# Altium PCB pcb Rev1.1.2_2021-03-04.pcbdoc (part 2 of 2)
Units mil, origin at the board's own origin, x right, y up, seen from the top; angles counter-clockwise.
Board outline 3907.67 x 3907.67 mil, 2 copper layers (Top Layer, Bottom Layer); 144 components, 104 nets, 451 pads, 133 vias.
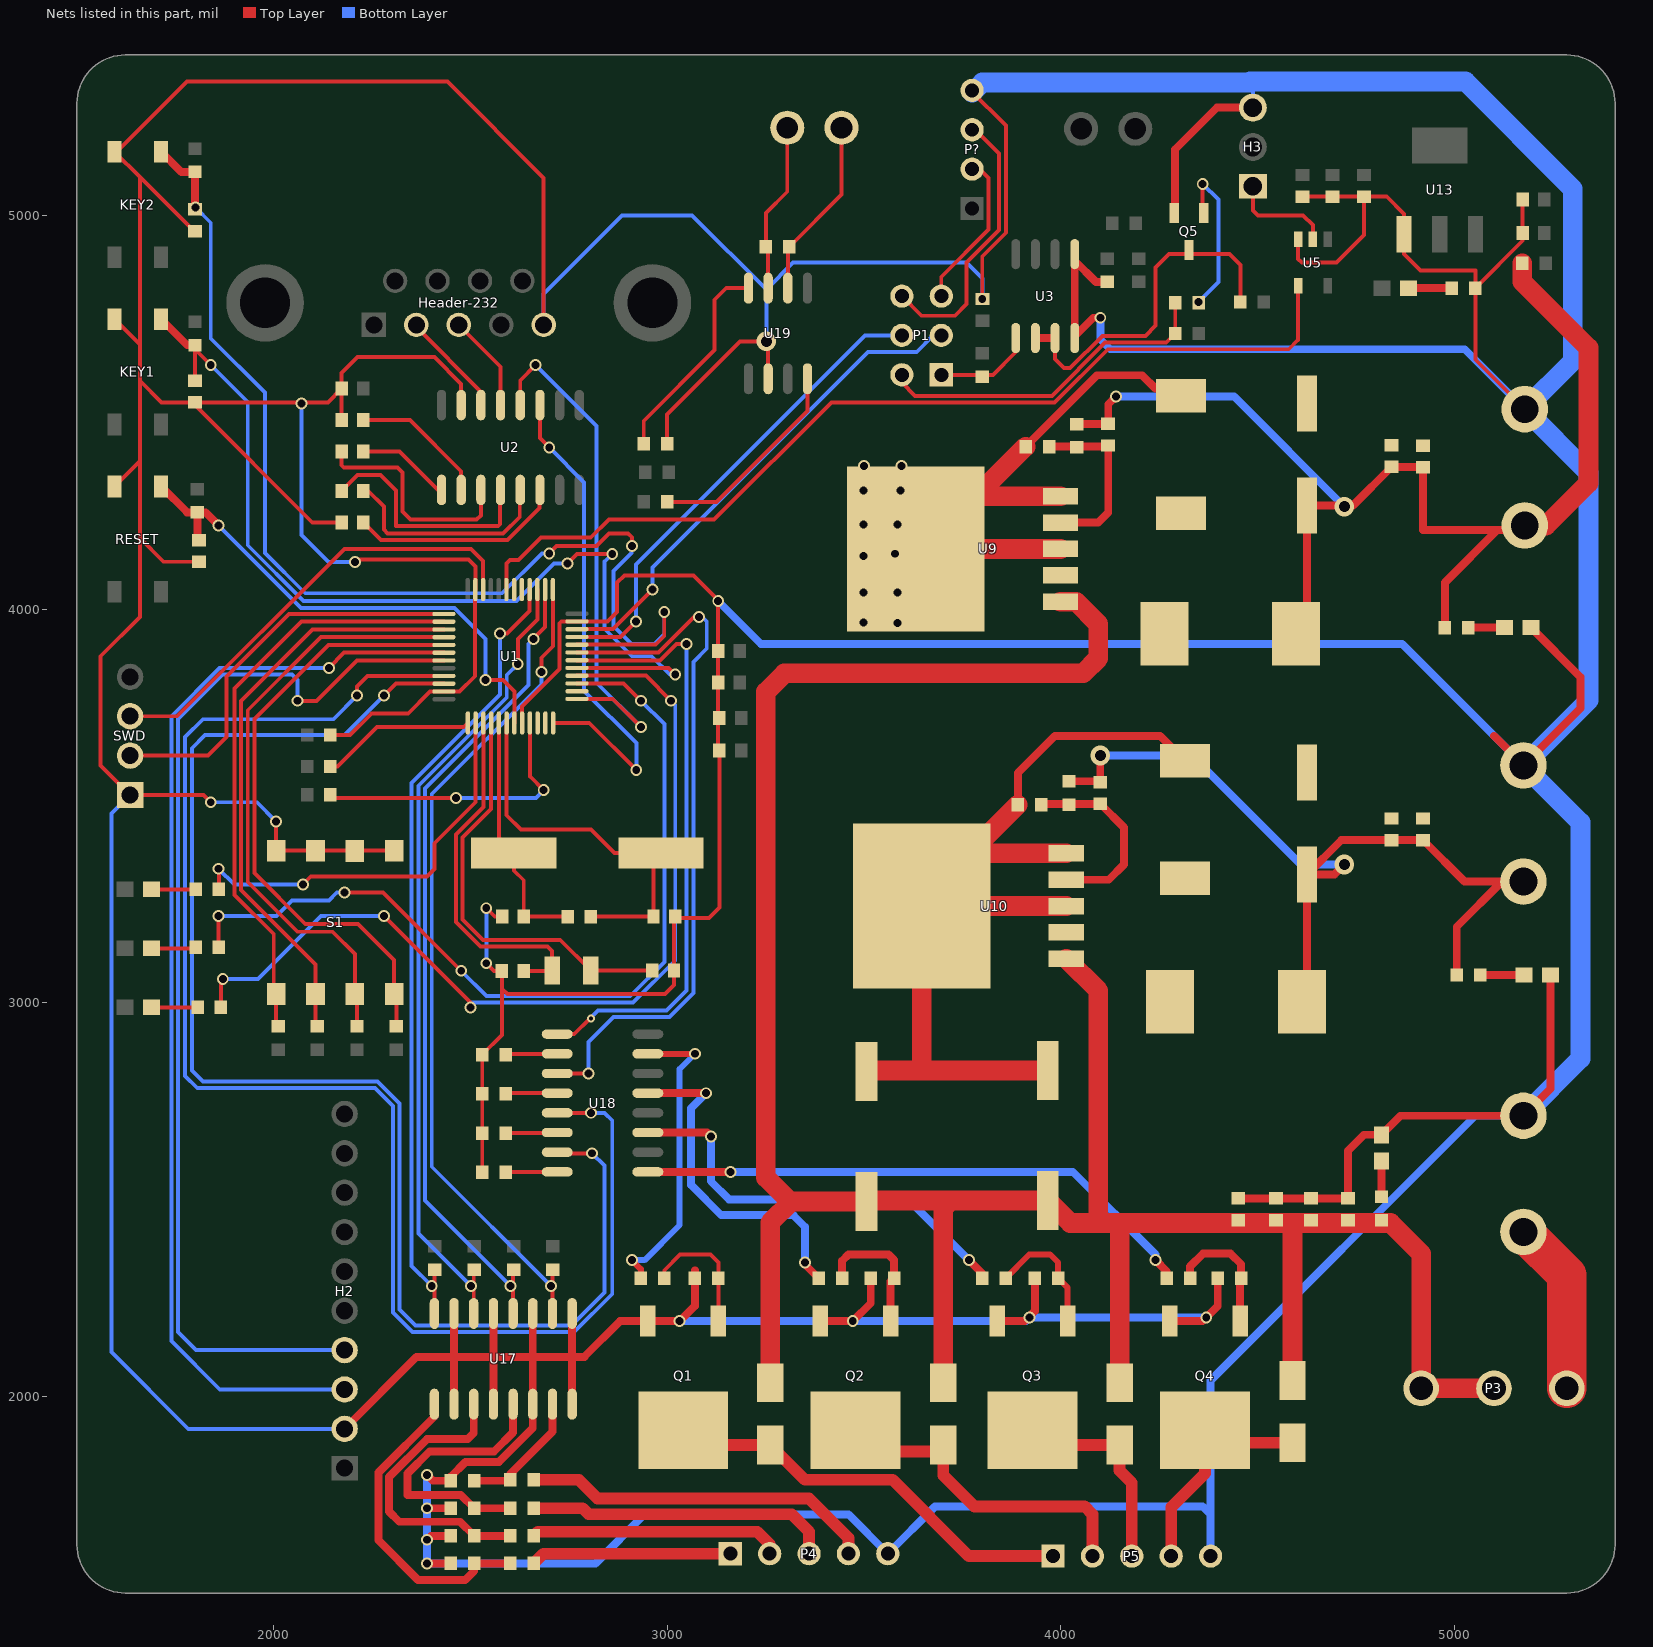
[diagram p2: the nets of this part, all layers, seen from the top]

## Via types
v1: diameter 30, hole 20, Top Layer to Bottom Layer, 123 vias
v2: diameter 50, hole 28, Top Layer to Bottom Layer, 5 vias
v3: diameter 118.11, hole 118.11, Top Layer to Bottom Layer, 4 vias
v4: diameter 20, hole 10, Top Layer to Bottom Layer, 1 vias

## Nets (pads, with @x,y where several pads share a name; then routed paths per layer and width w, separated by ;. In a path a pad name is that pad's centre, name@x,y a point inside that pad or via, vN(x,y) a via of type N, cw(c..) or ccw(c..) an arc to the next point about the centre after c; other vN are vias at no path point) (continued)
GND: C1.1 C2.1 C3.1 C4.1 C5.1 C8.1 C9.2 C10.2 C11.2 C12.1 C13.1 C14.1 C15.1 C16.1 C17.1 C18.1 C19.1 C20.1 C21.2 C22.1 C23.1 C24.1 C25.1 C26.2 C27.1 C29.1 C30.1 C31.1 C32.1 C40.1 C46.2 C47.2 D2.2 D3.2 H2.2 H3.3 Header-232.5 KEY1.2 KEY2.2 LED5.2 LED6.2 LED8.2 P4.5 P5.5 P?.4 Q1.3 Q2.3 Q3.3 Q4.3 Q5.2 R2.2 R7.2 R12.2 R14.2 R33.1 R34.1 R35.1 R36.1 R37.2 R39.1 R41.1 R43.1 R44.2 R46.1 R47.2 R48.2 R49.1 R57.1 RESET.2 S1.1 S1.2 S1.3 S1.4 SWD.1 U1.8 U1.23 U1.35 U1.47 U2.15 U3.4 U3.5 U5.3 U9.3 U9.5 U9.6 U10.3 U10.5 U10.6 U12.1 U13.1 U15.1 U16.1 U17.2 U17.4 U17.6 U17.8 U17.9 U17.11 U17.13 U17.15 U19.2 | length 40163.2
  Top Layer w10: RESET.2@1595.94,4311.5 1660,4375.56 ; KEY1.2@1595.94,4736.5 1660,4672.44 ; C15.1@1800,4960.08 1797.35,4960.08 1660,5097.44 ; C5.1@1810,4120.08 1719.92,4120.08 1660,4180 ; v1(1840,3509.03) 1821.39,3527.64 SWD.1@1635,3527.64 1560,3602.64 1560,3880 1660,3980 1660,4180 ; v1(2006.02,3460) S1.4@2006.02,3386.02 S1.3@2106.02,3386.02 S1.1@2306.02,3386.02 ; R2.2@2143.91,3680 2194.12,3680 2248.12,3734 2340.86,3734 2397.46,3790.6 U1.47@2432.21,3790.6 2472.31,3790.6 2510.87,3829.17 2510.87,4048.07 U1.35@2512.31,4049.5 2512.31,4107.69 2494.51,4125.49 2212.3,4125.49 v1(2206.15,4119.34) ; C27.1@2172.44,4220 2097.88,4220 1800,4517.88 C14.1@1800,4525.08 ; C8.1@2172.45,4480 C9.2@2172.45,4560 ; v1(2389.66,1635.29) v1@2399.66,1645.29 ; U2.15@2476.21,4518.04 2476.21,4571.88 2408.08,4640 2212.44,4640 2172.45,4600 C9.2@2172.45,4560 ; R46.1@2529.65,2568.72 R43.1@2529.65,2668.38 R39.1@2529.65,2867.72 2579.72,2917.78 2579.72,3035.28 ; v1(2540,3100) 2559.45,3080.55 C1.1@2579.72,3080.55 2579.72,3035.28 ; v1(2540,3240) 2561.45,3218.55 C3.1@2580,3218.55 C3.1@2578.55,3220 ; U1.8@2631.01,3710.5 2631.01,3752.82 2726.21,3848.02 2726.21,3963.82 2730.79,3968.4 U1.23@2770.21,3968.4 2848.22,3968.4 2872.3,3992.49 2872.3,4067.33 2890.62,4085.64 3066.58,4085.64 3129.02,4023.2 v1(3129.02,4020) C16.1@3129.02,3893.64 3129.02,3643.67 C19.1@3132.22,3640.47 3132.22,3242.18 3105.32,3215.28 3016.73,3215.28 C2.1@3016.73,3081.55 3016.73,3044.46 2993.98,3021.7 2593.3,3021.7 2579.72,3035.28 ; Header-232.5@2685.75,4721.73 2685.75,5095.46 2441.2,5340 1779.07,5340 1600.56,5161.5 KEY2.2@1595.94,5161.5 1660,5097.44 ; R49.1@2999.31,4420 2999.31,4494.33 3184.98,4680 v2(3251.34,4680) 3255.98,4675.37 U19.2@3255.98,4584.98 ; U9.6@3631.23,4152.64 3765.23,4286.64 U9.6@3784.35,4286.64 ; P?.4@3770.44,5317.63 3860,5228.06 3860,4955.96 3800,4895.96 3800,4787.67 v1(3800.11,4787.56) ; U3.4@4035,4688.52 U3.4@4035,4693.17 ; U3.5@4035,4885 U3.5@4035,4901.52 ; 4240,4560 4286.7,4560 D3.2@4305,4541.7 ; U5.3@4602.6,4939.05 4602.6,4889.3 4611.9,4880 4700,4880 4769.8,4949.8 C13.1@4769.8,5047.54 ; C12.1@4613.61,5047.54 C13.1@4769.8,5047.54 ; C11.2@5173.03,5040.02 C40.1@5173.03,4955.37 5173.03,4935.55 R7.2@5052.67,4815.19 ; U15.1@5178.29,4507.64 5052.67,4633.25 R7.2@5052.67,4815.19 ; 1660,4180 1660,4375.56 ; 1660,4375.56 1660,4580 ; 1660,4580 1660,4672.44 ; 1660,4580 1714.92,4525.08 C14.1@1800,4525.08 ; 1660,4672.44 1660,5097.44 ; C14.1@1800,4525.08 2137.53,4525.08 C9.2@2172.45,4560 ; C13.1@4769.8,5047.54 4827.65,5047.54 4871.71,5003.48 U13.1@4871.71,4951.86 4871.71,4901.52 4913.23,4860 5052.67,4860 R7.2@5052.67,4815.19
  Top Layer w20: H2.2@2180,1917.22 2362.78,2100 2458.08,2100 ; v1(2389.66,1575.29) R36.1@2449.69,1575.29 ; v1(2389.66,1715.29) R34.1@2449.69,1715.29 ; v1(2389.66,1800) 2404.37,1785.29 R33.1@2449.69,1785.29 2449.69,1795.69 2487,1833 2571.82,1833 2658.08,1919.26 U17.6@2658.08,1980 2658.08,2100 ; v1@2399.66,1645.29 R35.1@2449.69,1645.29 ; U17.2@2458.08,1980 2458.08,2100 ; U17.15@2458.08,2210.32 2458.08,2100 ; U17.4@2558.08,1980 2558.08,2100 ; U17.13@2558.08,2210.32 2558.08,2100 ; U17.11@2658.08,2210.32 2658.08,2100 ; U17.8@2758.08,1980 2758.08,2100 ; U17.9@2758.08,2210.32 2758.08,2100 ; 3070.05,2320 R37.2@3070.05,2300 3070.05,2229.69 3031.36,2191 v1(3031,2191) Q1.3@2950.36,2191 2880,2191 2789,2100 2758.08,2100 ; Q2.3@3388,2191 v1(3471,2191) 3516.58,2236.58 R44.2@3516.58,2300 ; Q3.3@3838,2191 3908,2191 3933.53,2216.53 R47.2@3933.53,2300 ; R14.2@3890.35,3502.98 3890.35,3583.12 3985,3677.78 4251.57,3677.78 D2.2@4315,3614.34 ; R12.2@3910.35,4412.64 4091.71,4594 4206,4594 4240,4560 ; v1(4100,4740) 4081.83,4740 4035,4693.17 4035,4885 4089.09,4830.91 R57.1@4117.23,4830.91 ; Q4.3@4276.04,2191 4360,2191 v1(4369,2200) 4398.38,2229.38 R48.2@4398.38,2300 ; Q5.2@4289.34,5006.54 4289.34,5167.05 4396.07,5273.78 H3.3@4487.37,5273.78 ; C24.1@4450.32,2502.68 C25.1@4546.12,2502.68 C32.1@4635.16,2502.68 C31.1@4729.36,2502.68 4729.36,2623.78 4769.8,2664.22 LED8.2@4814.36,2664.22 4862.82,2712.68 U12.1@5175,2712.68 5243.5,2781.18 LED6.2@5243.5,3070.28 ; 5100.14,3677.78 U16.1@5175,3602.91 5320,3747.91 5320,3826.84 LED5.2@5193.9,3952.94 ; 2458.08,2100 2558.08,2100 ; 2558.08,2100 2658.08,2100 ; 2658.08,2100 2758.08,2100
  Top Layer w50: C21.2@3505.88,2825.16 3508.24,2827.52 3646.23,2827.52 ; U9.6@3631.23,4152.64 U9.3@3998.77,4152.64 ; R14.2@3890.35,3502.98 3710.48,3323.11 U10.6@3710.48,3309.52 ; R12.2@3910.35,4412.64 3784.35,4286.64 U9.5@3998.77,4286.64 ; C26.2@3966.54,2827.52 3646.23,2827.52 ; U10.3@4013.77,3245.28 U10.6@3646.23,3245.28 ; U10.5@4013.77,3379.28 3780.23,3379.28 U10.6@3710.48,3309.52 ; 3646.23,2827.52 U10.6@3646.23,3245.28 ; U10.6@3646.23,3245.28 U10.6@3710.48,3309.52
  Bottom Layer w10: SWD.1@1635,3527.64 1587.64,3480.28 1587.64,2112.36 1782.78,1917.22 H2.2@2180,1917.22 ; v1(1840,3509.03) 1956.99,3509.03 v1(2006.02,3460) ; v1(2070.16,4522.36) 2070.16,4187.92 2138.74,4119.34 v1(2206.15,4119.34) ; v1(2540,3100) v1(2540,3240) ; Header-232.5@2685.75,4721.73 2685.75,4800.86 2884.89,5000 3063.07,5000 3251.34,4811.73 ; v2(3251.34,4680) 3251.34,4811.73 ; v1(3800.11,4787.56) 3800.11,4839.89 3760,4880 3319.61,4880 3251.34,4811.73 ; 4482.37,5337.63 4487.37,5332.63 H3.3@4487.37,5273.78
  Bottom Layer w20: v1(2389.66,1800) v1(2389.66,1715.29) v1(2389.66,1635.29) v1(2389.66,1575.29) 2817.42,1575.29 2942.13,1700 3460,1700 P4.5@3560,1600 3680,1720 4360,1720 4380,1700 ; v1(3031,2191) v1(3471,2191) 3911,2191 v1(3920,2200) v1(4369,2200) ; v1(3129.02,4020) 3237.54,3911.49 4866.42,3911.49 U16.1@5175,3602.91 ; v1(4100,4740) 4100,4685.3 4125.3,4660 5025.92,4660 U15.1@5178.29,4507.64 ; P5.5@4380,1593.98 4380,1700 ; U12.1@5175,2712.68 5052.68,2712.68 4380,2040 4380,1700
  Bottom Layer w50: P?.4@3774.26,5311.76 3777.11,5314.62 3800.12,5337.63 4482.37,5337.63 ; 4480,5340 5027.68,5340 5300,5067.68 5300,4629.35 U15.1@5178.29,4507.64 5340,4345.92 5340,3767.91 U16.1@5175,3602.91 5320,3457.91 5320,2857.68 U12.1@5175,2712.68
  other v1: 3584.35,3964.22 3498.33,3966.11 3498.33,4042.1 3584.35,4042.1 3498.33,4134.62 3578.33,4140.26 3498.33,4214.62 3584.35,4214.62 3498.33,4300.92 3592.43,4300.92 3499.17,4363.68 3595.06,4363.68
I2C1_SCL: H2.3 U1.42 | length 2837.5
  Top Layer w10: v1(2140,3850.3) 2178.7,3889 U1.42@2432.21,3889
  Bottom Layer w10: v1(2140,3850.3) 1862.66,3850.3 1740,3727.64 1740,2140 1862.78,2017.22 H2.3@2180,2017.22
I2C1_SDA: H2.4 U1.43 | length 2822.2
  Top Layer w10: v1(2060,3766.84) 2108.86,3766.84 2211.43,3869.4 U1.43@2432.21,3869.4
  Bottom Layer w10: v1(2060,3766.84) 2060,3819.3 2046,3833.3 1869.7,3833.3 1757,3720.6 1757,2163 1802.78,2117.22 H2.4@2180,2117.22
IN1: R25.1 U1.28 U17.16 | length 2036.7
  Top Layer w10: U17.16@2408.08,2210.32 2408.08,2320.83 R25.1@2408.82,2321.57 ; v1(2575,3937.64) 2592.75,3937.64 2650.11,3995 U1.28@2650.11,4049.5
  Bottom Layer w10: v1(2401.44,2280) 2350.44,2331 2350.44,3558.08 2575,3782.64 v1(2575,3937.64)
IN2: R26.1 U1.27 U17.14 | length 2061.9
  Top Layer w10: U17.14@2508.08,2210.32 2508.08,2320.65 R26.1@2509,2321.57 ; v1(2620,3860) 2620,3923.83 2669.81,3973.64 U1.27@2669.81,4049.5
  Bottom Layer w10: v1(2501.44,2280) 2367.44,2414 2367.44,3551.04 2592,3775.6 2592,3832 v1(2620,3860)
IN3: R27.1 U1.26 U17.12 | length 2097.7
  Top Layer w10: U17.12@2608.08,2210.32 2608.08,2319.85 R27.1@2609.79,2321.56 ; v1(2660,3923.83) 2660,3924.6 2689.51,3954.11 U1.26@2689.51,4049.5
  Bottom Layer w10: v1(2601.44,2280) 2384.44,2497 2384.44,3544 2647,3806.55 2647,3910.83 v1(2660,3923.83)
IN4: R28.1 U1.25 U17.10 | length 2134
  Top Layer w10: v1(2680,3840) 2680,3876.17 2709.21,3905.38 U1.25@2709.21,4049.5 ; U17.10@2708.08,2210.32 2708.08,2320.83 R28.1@2708.82,2321.56
  Bottom Layer w10: v1(2680,3840) 2680,3808.19 2401.44,3529.63 2401.44,2583 v1(2704.44,2280)
KEY1: C14.2 KEY1.4 R8.2 U1.17 | length 2475.6
  Top Layer w10: C14.2@1800,4580.19 R8.2@1800,4660 ; R8.2@1800,4670.34 R8.2@1800,4660 ; v1(1840,4620) R8.2@1800,4660 ; v1(2746.32,4115.39) 2770.93,4140 v1(2860,4140) ; U1.17@2770.21,3850.3 3003,3850.3 v1(3020,3833.3)
  Top Layer w20: KEY1.4@1714.05,4736.5 1780.2,4670.34 R8.2@1800,4670.34
  Bottom Layer w10: v1(1840,4620) 1934,4526 1934,4161.96 2075.96,4020 2616.99,4020 2712.38,4115.39 v1(2746.32,4115.39) ; v1(2860,4140) 2840.91,4120.91 2840,4120.91 2840,3949.85 2909.85,3880 2960,3880 3006.7,3833.3 v1(3020,3833.3)
KEY2: C15.2 KEY2.4 R9.2 U1.20 | length 2922.4
  Top Layer w10: v1(2700,4141.19) 2718.81,4160 2819.66,4160 2851.85,4192.19 2900,4192.19 2909.85,4182.34 v1(2909.85,4160) ; U1.20@2770.21,3909.3 2970.16,3909.3 2992.02,3931.15 v1(2992.02,3992.49)
  Top Layer w20: KEY2.4@1714.05,5161.5 1765.2,5110.34 R9.2@1800,5110.34 C15.2@1800,5020
  Bottom Layer w10: v1(1801.35,5020) 1840,4981.35 1840,4687.52 1977.88,4549.65 1977.88,4142.12 2080,4040 2580,4040 2681.19,4141.19 v1(2700,4141.19) ; 2908.51,4142.12 2863,4096.61 2863,3957 2908.51,3911.49 2966.71,3911.49 2992.02,3936.8 v1(2992.02,3992.49)
LED1: R6.2 U1.16 | length 2366.8
  Top Layer w10: R6.2@1865.66,2987.91 1865.66,3055 v1(1870.66,3060) ; v1(2280,3220) 2500,3000 v1(2500,2987.91) ; U1.16@2770.21,3830.6 2945.4,3830.6 v1(3009.17,3766.84)
  Bottom Layer w10: v1(1870.66,3060) 1960,3060 2120,3220 v1(2280,3220) ; v1@2500,3000 2912.71,3000 3020,3107.29 3020,3756 v1(3009.17,3766.84)
LED2: R22.2 U1.15 | length 2250.2
  Top Layer w10: v1(1860,3220) 1860,3141.21 R22.2@1860.66,3140.55 ; v1(2180,3280) 2277.27,3280 v1(2476.21,3081.06) ; U1.15@2770.21,3810.9 2888.64,3810.9 v1(2932.71,3766.84)
  Bottom Layer w10: v1(1860,3220) 2006.61,3220 2046.61,3260 2140,3260 2160,3280 v1(2180,3280) ; v1(2476.21,3081.06) 2540.27,3017 2905.66,3017 2992.17,3103.5 2992.17,3707.38 v1(2932.71,3766.84)
LED3: R23.2 U1.2 | length 1047.9
  Top Layer w10: v1(1860,3340) 1860.66,3339.34 R23.2@1860.66,3287.91 ; v1(2074.05,3300) 2094.05,3320 2388.82,3320 2408.82,3340 2408.82,3404.94 2512.91,3509.03 U1.2@2512.91,3710.5
  Bottom Layer w10: v1(1860,3340) 1900,3300 v1(2074.05,3300)
NetC6_1: C6.1 U2.3 | length 572.4
  Top Layer w10: C6.1@2172.45,4400 2172.45,4365.32 2177.76,4360 2314.34,4360 2327.3,4347.04 2327.3,4248.12 2347.9,4227.52 2515.6,4227.52 2526.21,4238.12 U2.3@2526.21,4302.65
NetC6_2: C6.2 U2.1 | length 239
  Top Layer w10: C6.2@2227.56,4400 2320,4400 2417.35,4302.65 U2.1@2426.21,4302.65
NetC7_1: C7.1 U2.5 | length 531.8
  Top Layer w10: C7.1@2227.56,4300 2240,4300 2280,4260 2280,4201.55 2289.36,4192.19 2582.88,4192.19 2625,4234.31 U2.5@2625,4272.3
NetC7_2: C7.2 U2.4 | length 584.8
  Top Layer w10: C7.2@2172.45,4300 2212.45,4340 2271.5,4340 2310.3,4301.2 2310.3,4210.52 2570.16,4210.52 2575,4215.35 U2.4@2575,4272.3
NetC8_2: C8.2 U2.2 | length 349.8
  Top Layer w10: C8.2@2227.56,4480 2346.21,4480 2476.21,4350 U2.2@2476.21,4302.65
NetC27_2: C27.2 U2.6 | length 515.5
  Top Layer w10: C27.2@2227.55,4220 2272.36,4175.19 2593.64,4175.19 2675,4256.55 U2.6@2675,4272.3
NetC27_CFF_1: C27_CFF.1 R11.1 R12.1 U9.4 | length 453.7
  Top Layer w20: R12.1@3969.66,4412.64 4117.23,4412.64 C27_CFF.1@4120,4415.4 4120,4244.94 4094.7,4219.64 U9.4@3998.77,4219.64
NetC33_1: C33.1 R13.1 R14.1 U10.4 | length 492.2
  Top Layer w20: R14.1@3949.66,3502.98 3951.76,3505.08 C33.1@4099.77,3505.08 4160,3444.85 4160,3351.07 4121.21,3312.28 U10.4@4013.77,3312.28
NetD1_1: D1.1 P5.1 Q1.1 | length 1080.5
  Top Layer w30: Q1.1@3040.36,1934 3098.36,1876 D1.1@3261,1876 3349.33,1787.67 3572.33,1787.67 3766.02,1593.98 P5.1@3980,1593.98
NetD4_1: D4.1 P5.2 Q2.1 | length 832.4
  Top Layer w30: Q2.1@3478,1914 3532,1860 3701,1860 3701,1799 3780,1720 4060,1720 4080,1700 P5.2@4080,1593.98
NetD5_1: D5.1 P5.3 Q3.1 | length 531.6
  Top Layer w30: Q3.1@3928,1914 3966,1876 D5.1@4149.04,1876 4149.04,1810.96 4180,1780 P5.3@4180,1593.98
NetD6_1: D6.1 P5.4 Q4.1 | length 590.9
  Top Layer w30: P5.4@4280,1593.98 4280,1718.56 4366.04,1804.6 Q4.1@4366.04,1914 4398.04,1882 D6.1@4588.04,1882
NetLED1_2: LED1.2 R6.1 | length 116.8
  Top Layer w10: LED1.2@1689.5,2987.91 R6.1@1806.35,2987.91
NetLED2_2: LED2.2 R22.1 | length 112.9
  Top Layer w10: LED2.2@1689.5,3138.05 1798.85,3138.05 R22.1@1801.35,3140.55
NetLED3_2: LED3.2 R23.1 | length 111.8
  Top Layer w10: LED3.2@1689.5,3287.91 R23.1@1801.35,3287.91
NetLED4_2: LED4.2 R7.1 | length 110.8
  Top Layer w20: LED4.2@4882.56,4815.19 R7.1@4993.36,4815.19
NetLED5_1: LED5.1 R17.2 | length 92.4
  Top Layer w20: R17.2@5034.66,3952.64 5126.6,3952.64 LED5.1@5126.9,3952.94
NetLED6_1: LED6.1 R15.2 | length 111.8
  Top Layer w20: R15.2@5064.66,3070.28 LED6.1@5176.5,3070.28
NetLED8_1: LED8.1 R19.2 | length 90.3
  Top Layer w20: R19.2@4814.36,2506.88 LED8.1@4814.36,2597.22
NetP1_1: P1.1 R56.2 U3.1 | length 248.9
  Top Layer w10: P1.1@3695.89,4595.02 3827.46,4595.02 3885,4652.55 U3.1@3885,4688.52
NetP1_2: P1.2 R53.2 R54.1 | length 871.3
  Top Layer w10: P1.2@3595.89,4595.02 3595.89,4575.35 3629.53,4541.7 3976.85,4541.7 4112.15,4677 4267.34,4677 R53.2@4290.35,4700 R54.1@4290.35,4777.63
NetP3_3: P3.3 U12.2 | length 443
  Top Layer w100: U12.2@5175,2417.41 5285,2307.41 P3.3@5285,2020
NetP4_1: P4.1 R29.1 | length 509.7
  Top Layer w30: R29.1@2660.52,1575.29 2685.23,1600 P4.1@3160,1600
NetP4_2: P4.2 R30.1 | length 641.4
  Top Layer w30: R30.1@2660.52,1645.29 2671.2,1655.98 3228.5,1655.98 3260,1624.47 P4.2@3260,1600
NetP4_3: P4.3 R31.1 | length 780
  Top Layer w30: R31.1@2660.52,1715.29 2784.71,1715.29 2800,1700 3315.98,1700 3360,1655.98 P4.3@3360,1600
NetP4_4: P4.4 R32.1 | length 900.7
  Top Layer w30: R32.1@2660.52,1787.67 2775.18,1787.67 2822.85,1740 3360,1740 3460,1640 P4.4@3460,1600
NetQ1_2: Q1.2 R37.1 R38.2 | length 310.9
  Top Layer w10: R38.2@2992.02,2300 2992.02,2319.57 3032.44,2360 3109.36,2360 3129.36,2340 3129.36,2320 ; Q1.2@3129.36,2191 R37.1@3129.36,2300
NetQ2_2: Q2.2 R40.2 R44.1 | length 346.9
  Top Layer w20: R40.2@3444.07,2300 3444.07,2344.07 3460,2360 3561.76,2360 3575.89,2345.88 R44.1@3575.89,2300 3567,2291.11 Q2.2@3567,2191
NetQ3_2: Q3.2 R42.2 R47.1 | length 325.3
  Top Layer w15: R42.2@3859.42,2300 3919.42,2360 3972.42,2360 3992.84,2339.57 R47.1@3992.84,2300 4017,2275.84 Q3.2@4017,2191
NetQ4_1: Q5.1 R54.2 | length 407.2
  Top Layer w10: R54.2@4349.65,4777.63 v1(4349.65,4780) ; Q5.1@4360,5012.66 v1(4360,5080)
  Bottom Layer w10: v1(4349.65,4780) 4400,4830.35 4400,5040 v1(4360,5080)
NetQ4_2: Q4.2 R45.2 R48.1 | length 329.4
  Top Layer w20: R45.2@4328.04,2300 4328.04,2329.66 4360.6,2362.22 4430.83,2362.22 4457.69,2335.35 R48.1@4457.69,2300 4455.04,2297.35 Q4.2@4455.04,2191
NetQ4_3: Q5.3 R55.2 U3.2 U3.3 | length 895.1
  Top Layer w10: U3.3@3985,4688.52 3985,4635 4007.81,4612.19 4023.3,4612.19 4105.11,4694 4214.23,4694 4240,4719.77 4240,4867.23 4274.29,4901.52 4427.79,4901.52 4455.77,4873.53 R55.2@4455.77,4780
  Top Layer w20: U3.2@3935,4688.52 U3.3@3985,4688.52
NetR29_2: R29.2 R36.2 U17.1 | length 810.5
  Top Layer w20: U17.1@2408.08,1980 2408.08,1948.08 2266,1806 2266,1634 2366.71,1533.29 2486.29,1533.29 2509,1556 R36.2@2509,1575.29 R29.2@2601.21,1575.29
NetR30_2: R30.2 R35.2 U17.3 | length 756.1
  Top Layer w20: U17.3@2508.08,1980 2508.08,1906.64 2492.92,1891.48 2389.66,1891.48 2293,1794.82 2293,1707.4 2319.12,1681.28 2473.01,1681.28 R35.2@2509,1645.29 R30.2@2601.21,1645.29
NetR31_2: R31.2 R34.2 U17.5 | length 712.9
  Top Layer w20: R31.2@2601.21,1715.29 R34.2@2509,1715.29 2474.99,1749.3 2340,1749.3 2340,1803.63 2396.37,1860 2560,1860 2608.08,1908.08 U17.5@2608.08,1980
NetR32_2: R32.2 R33.2 U17.7 | length 329.8
  Top Layer w20: R33.2@2509,1785.29 2598.82,1785.29 R32.2@2601.21,1787.67 2601.21,1803.12 2708.08,1910 U17.7@2708.08,1980
NetR38_1: R38.1 U18.15 | length 784.3
  Top Layer w15: v1(2909.85,2345.88) 2932.71,2323.02 R38.1@2932.71,2300 ; U18.15@2950.51,2870 v1(3070.05,2870)
  Bottom Layer w15: v1(2909.85,2345.88) 2942.13,2345.88 3031,2434.75 3031,2830.95 v1(3070.05,2870)
NetR39_2: R39.2 U18.2 | length 132.2
  Top Layer w10: R39.2@2588.96,2867.72 2591.25,2870 U18.2@2720.19,2870
NetR40_1: R40.1 U18.13 | length 875.5
  Top Layer w20: U18.13@2950.51,2770 v1(3098.36,2770) ; v1(3349.33,2339.57) 3349.33,2335.43 R40.1@3384.76,2300
  Bottom Layer w20: v1(3098.36,2770) 3060,2731.64 3060,2537 3137,2460 3320,2460 3349.33,2430.67 v1(3349.33,2339.57)
NetR41_2: R41.2 U18.4 | length 132
  Top Layer w10: R41.2@2588.96,2768.05 2590.91,2770 U18.4@2720.19,2770
NetR42_1: R42.1 U18.11 | length 1076.3
  Top Layer w20: U18.11@2950.51,2670 3100.55,2670 v1(3110.55,2660) ; v1(3766.02,2345.88) 3800.11,2311.79 R42.1@3800.11,2300
  Bottom Layer w20: v1(3110.55,2660) 3110.55,2546.45 3157,2500 3611.9,2500 v1(3766.02,2345.88)
NetR43_2: R43.2 U18.6 | length 131.9
  Top Layer w10: R43.2@2588.96,2668.38 2718.58,2668.38 U18.6@2720.19,2670
NetR45_1: R45.1 U18.9 | length 1448.4
  Top Layer w20: U18.9@2950.51,2570 v1(3160,2570) ; v1(4240,2345.88) 4268.73,2317.15 R45.1@4268.73,2300
  Bottom Layer w20: v1(3160,2570) 4030,2570 4240,2360 v1(4240,2345.88)
NetR46_2: R46.2 U18.8 | length 131.8
  Top Layer w10: R46.2@2588.96,2568.72 2590.25,2570 U18.8@2720.19,2570
NetR49_2: R49.2 U19.8 | length 538.5
  Top Layer w10: R49.2@2940,4420 2940,4478.05 3120,4658.04 3120,4785.65 3149.64,4815.3 U19.8@3205.98,4815.3
NetR50_1: R50.1 U8.1 U19.7 | length 432.2
  Top Layer w10: U19.7@3255.98,4815.3 3255.98,4914.37 R50.1@3250.34,4920 3250.34,5005.8 3304.63,5060.09 U8.1@3304.63,5222.64
NetR50_2: R50.2 U8.2 U19.6 | length 463.9
  Top Layer w10: U19.6@3305.98,4815.3 3305.98,4916.32 R50.2@3309.66,4920 3442.43,5052.77 U8.2@3442.43,5222.64
NetR52_2: R52.2 U19.4 | length 533.8
  Top Layer w10: R52.2@2999.31,4272.3 3124.67,4272.3 3355.98,4503.61 U19.4@3355.98,4584.98
NRST: C5.2 R3.2 RESET.4 U1.7 | length 1326.9
  Top Layer w10: v1(2537.87,3819.3) 2581.92,3819.29 2611.31,3789.9 U1.7@2611.31,3710.5
  Top Layer w20: RESET.4@1714.05,4311.5 1780.01,4245.54 R3.2@1805.84,4245.54 ; C5.2@1810,4175.19 1805.84,4179.35 R3.2@1805.84,4245.54 ; v1(1860,4212.36) 1826.82,4245.54 R3.2@1805.84,4245.54
  Bottom Layer w10: v1(1860,4212.36) 1859.56,4212.36 2068.92,4003 2458.71,4003 2537.87,3923.83 v1(2537.87,3819.3)
OSC8_IN: C3.2 R1.2 U1.5 X3.1 | length 629.3
  Top Layer w10: U1.5@2572.01,3710.5 2572.01,3417.79 X3.1@2609.8,3380 2609.8,3336.2 2635.11,3310.89 C3.2@2635.11,3218.55 R1.2@2746.32,3218.55
OSC8_OUT: C4.2 R1.1 U1.6 X3.2 | length 994.9
  Top Layer w10: U1.6@2591.71,3710.5 2591.71,3476.13 2627.83,3440 2805.63,3440 2865.63,3380 X3.2@2983.82,3380 2964.89,3361.07 C4.2@2964.89,3218.55 R1.1@2805.63,3218.55
OSC32_IN: C1.2 U1.3 X2.2 | length 931.9
  Top Layer w10: U1.3@2532.61,3710.5 2532.61,3496.65 2463,3427.04 2463,3204.57 2525.01,3142.56 2695.49,3142.56 2707.42,3130.63 X2.2@2707.42,3081.55 2706.42,3080.55 C1.2@2634.83,3080.55
OSC32_OUT: C2.2 U1.4 X2.1 | length 1064.3
  Top Layer w10: U1.4@2552.31,3710.5 2552.31,3492.31 2480,3420 2480,3211.61 2532.05,3159.56 2727.84,3159.56 X2.1@2805.85,3081.55 C2.2@2961.62,3081.55
OUT1: U1.18 U18.1 | length 1552.8
  Top Layer w10: U18.1@2720.19,2920 2763.5,2920 2803.5,2960 v4(2805.63,2960) ; U1.18@2770.21,3870 2770.81,3869.4 2981.64,3869.4 3023.72,3911.49 v1(3048.92,3911.49)
  Bottom Layer w10: v4(2805.63,2960) 2805.63,2962.13 2823.5,2980 2997.83,2980 3048.92,3031.08 v1(3048.92,3911.49)
OUT2: U1.19 U18.3 | length 1807.6
  Top Layer w10: U18.3@2720.19,2820 v1(2800,2820) ; U1.19@2770.21,3889.6 2977.79,3889.6 3068.19,3980 v1(3080,3980)
  Bottom Layer w10: v1(2800,2820) 2800,2900 2863,2963 3004.87,2963 3065.92,3024.04 3065.92,3865.92 3100,3900 3100,3968.4 3088.4,3980 v1(3080,3980)
OUT3: U1.45 U18.5 | length 3886.1
  Top Layer w10: v1(2211.61,3780) 2211.61,3803.23 2238.39,3830 U1.45@2432.21,3830 ; U18.5@2720.19,2720 v1(2805.85,2720)
  Bottom Layer w10: v1(2211.61,3780) 2151.61,3720 1820,3720 1775.02,3675.02 1775.02,2813.6 1805.62,2783 2257,2783 2303,2737 2303,2212.96 2352.96,2163 2763,2163 2860,2260 2860,2700 2840,2720 v1(2805.85,2720)
OUT4: U1.46 U18.7 | length 3640.3
  Top Layer w10: v1(2280,3780) 2310.3,3810.3 U1.46@2432.21,3810.3 ; U18.7@2720.19,2620 2722.97,2617.22 v1(2808.63,2617.22)
  Bottom Layer w10: v1(2280,3780) 2180,3680 1825.84,3680 1792.02,3646.18 1792.02,2827.98 1820,2800 2264.04,2800 2320,2744.04 2320,2220 2360,2180 2755.96,2180 2840,2264.04 2840,2585.85 v1(2808.63,2617.22)
PA0: U1.10
PA1: U1.11
PA4: U1.14
PA8: U1.29
PA9: U1.30
PA15: R24.1 S1.5 U1.38 | length 1507.2
  Top Layer w10: R24.1@2011.62,2939.38 2006.02,2944.98 S1.5@2006.02,3021.7 2000,3027.73 2000,3173.83 1900,3273.83 1900,3797.64 2070.16,3967.8 U1.38@2432.21,3967.8
PB3: R18.1 S1.6 U1.39 | length 1497.9
  Top Layer w10: R18.1@2110.6,2939.38 2106.02,2943.96 S1.6@2106.02,3021.7 2106.02,3097.19 1917,3286.21 1917,3766.84 2098.26,3948.1 U1.39@2432.21,3948.1
PB4: R16.1 S1.7 U1.40 | length 1545.7
  Top Layer w10: R16.1@2211.62,2939.38 2211.62,3016.1 S1.7@2206.02,3021.7 2206.02,3123.21 2149.24,3180 2060,3180 1934,3306 1934,3742.74 2119.66,3928.4 U1.40@2432.21,3928.4
PB5: R10.1 S1.8 U1.41 | length 1568
  Top Layer w10: R10.1@2311.62,2939.38 2311.62,3016.1 S1.8@2306.02,3021.7 2306.02,3107.81 2213.83,3200 2080,3200 1951,3329 1951,3720.4 2139.3,3908.7 U1.41@2432.21,3908.7
R1IN: Header-232.3 U2.13 | length 247.7
  Top Layer w10: Header-232.3@2470,4721.73 2576.21,4615.53 U2.13@2576.21,4518.04
RX: P1.5 P?.2 | length 404.6
  Top Layer w10: P1.5@3695.89,4795.02 3695.89,4843.68 3815.87,4963.66 3815.87,5095.53 3799.63,5111.76 P?.2@3768.24,5111.76
RX_INPUT: H3.1 U5.2 | length 275.4
  Top Layer w10: H3.1@4480.31,5066.72 H3.1@4487.37,5073.78 4487.37,5012.63 4500,5000 4615.16,5000 4640,4975.16 U5.2@4640,4939.05
SWCLK: SWD.2 U1.37 | length 1036.9
  Top Layer w10: SWD.2@1635,3627.64 1833.29,3627.64 1880,3674.34 1880,3829 2038.5,3987.5 U1.37@2432.21,3987.5
SWDIO: SWD.3 U1.34 | length 1158.3
  Top Layer w10: SWD.3@1635,3727.64 1754.6,3727.64 2179.6,4152.64 2501.48,4152.64 2532.01,4122.11 U1.34@2532.01,4049.5
T1OUT: Header-232.2 U2.14 | length 271.7
  Top Layer w10: Header-232.2@2362.13,4721.73 2362.13,4715.96 2526.21,4551.88 U2.14@2526.21,4518.04
TX: P1.6 P?.3 | length 717
  Top Layer w10: P1.6@3595.89,4795.02 3645.89,4745.02 3730.3,4745.02 3760,4774.72 3760,4880 3843,4963 3843,5157 P?.3@3770,5230
UART1_RX: U1.31 U5.4 | length 2450.2
  Top Layer w10: U1.31@2591.11,4049.5 2591.11,4115.39 2599.91,4124.19 2622.28,4124.19 2679.44,4181.35 2805.4,4181.35 2851.56,4227.52 3118.9,4227.52 3416.46,4525.08 3622.11,4525.08 3622.49,4524.7 3983.89,4524.7 4119.19,4660 4578.6,4660 4602.6,4684 U5.4@4602.6,4820.94
UART2_RX: U1.13 U2.12 | length 1341
  Top Layer w10: U2.12@2626.21,4518.04 2626.21,4580.85 v1(2665.35,4620) ; U1.13@2770.21,3771.5 2861.21,3771.5 v1(2932.71,3700)
  Bottom Layer w10: v1(2665.35,4620) 2820,4465.35 2820,3812.71 v1(2932.71,3700)
UART2_TX: U1.12 U2.11 | length 1289.2
  Top Layer w10: U2.11@2676.21,4518.04 2676.21,4434.14 v1(2700,4410.35) ; U1.12@2709.81,3710.5 2801.58,3710.5 v1(2921.06,3591.02)
  Bottom Layer w10: v1(2700,4410.35) 2788.72,4321.63 2788.72,3791.66 2921.06,3659.32 v1(2921.06,3591.02)
UART3_RX: P1.3 U1.22 | length 1267.7
  Top Layer w10: U1.22@2770.21,3948.7 2861.33,3948.7 v1(2962.13,4049.5)
  Bottom Layer w10: v1(2962.13,4049.5) 2962.13,4105.67 3509.94,4653.49 3633.49,4653.49 3675.02,4695.02 P1.3@3695.89,4695.02
UART3_TX: P1.4 U1.21 | length 1228
  Top Layer w10: U1.21@2770.21,3929 2880.72,3929 v1(2920.12,3968.4)
  Bottom Layer w10: v1(2920.12,3968.4) 2920.12,4113.19 2920,4113.3 3501.71,4695.02 P1.4@3595.89,4695.02
VBAT: R5.1 U1.1 | length 395.1
  Top Layer w10: R5.1@2143.91,3600 2162.21,3600 2262.21,3700 2482.71,3700 U1.1@2493.21,3710.5
VDDA: R4.1 U1.9 | length 742.6
  Top Layer w10: R4.1@2143.91,3527.64 2151.54,3520 v1(2463,3520) ; U1.9@2650.71,3710.5 2650.71,3575.04 v1(2685.75,3540)
  Bottom Layer w10: v1@2458.71,3520 v1(2463,3520) 2665.75,3520 v1(2685.75,3540)
VIN: C21.1 C24.2 C25.2 C26.1 C31.2 C32.2 D1.2 D4.2 D5.2 D6.2 P3.1 P3.2 R19.1 U9.1 U10.1 | length 7065.1
  Top Layer w50: D1.2@3261,2034 3261,2441 3314.84,2494.84 ; D4.2@3701,2034 3701,2478.21 3720,2497.21 ; U9.1@3998.77,4018.64 4038.01,4018.64 4094.7,3961.94 4094.7,3874.94 4056.24,3836.48 3297.18,3836.48 3250.34,3789.64 3250.34,2555.63 3311.13,2494.84 3314.84,2494.84 ; U10.1@4013.77,3111.28 4094.77,3030.28 4094.77,2445.23 4100,2440 ; D5.2@4149.04,2034 4149.04,2438.76 4150.28,2440 ; D6.2@4588.04,2040 4588.04,2431.96 4580,2440 ; P3.2@5100,2020 P3.1@4915,2020 4915,2362.22 4837.22,2440 4580,2440 ; 3314.84,2494.84 C21.1@3505.88,2494.84 3508.24,2497.21 3720,2497.21 ; 3720,2497.21 C26.1@3966.54,2497.21 4023.75,2440 4100,2440 ; 4100,2440 4150.28,2440 ; 4150.28,2440 4580,2440
VOUT5V: D3.1 L3.1 U9.2
VOUT12V: D2.1 L2.1 U10.2
VOUT_5V: C22.2 C23.2 C27_CFF.2 C47.1 L3.2 R11.2 R17.1 R21.1 U15.2 | length 3063.9
  Top Layer w20: R11.2@4040,4469.66 C27_CFF.2@4119.14,4469.66 ; C27_CFF.2@4120,4470.51 4120,4520 v1(4140,4540) ; L3.2@4597.32,3937.64 4625,3965.31 C47.1@4625,4262.91 v2@4720,4262.91 ; v2@4741.68,4262.91 C23.2@4840,4361.23 4918.84,4361.23 C22.2@4920,4360.07 4920,4201.19 5109.26,4201.19 ; R17.1@4975.35,3952.64 4975.35,4067.28 5109.26,4201.19 ; U15.2@5178.29,4212.36 5167.12,4201.19 5109.26,4201.19
  Top Layer w50: R21.1@5172.19,4878.09 5172.19,4831.31 5340,4663.5 5340,4320 5232.36,4212.36 U15.2@5178.29,4212.36
  Bottom Layer w20: v1(4140,4540) 4440,4540 v2(4720,4260)
VOUT_12V: C29.2 C30.2 C33.2 C46.1 L2.2 R13.2 R15.1 U16.2 | length 2231.3
  Top Layer w20: R13.2@4020.35,3562.29 4097.67,3562.29 C33.2@4099.77,3560.19 4099.77,3627.4 v2(4100,3627.64) ; L2.2@4611.9,3002.28 4625,3015.38 C46.1@4625,3325.55 ; v2(4720,3351.07) 4694.48,3325.55 C46.1@4625,3325.55 ; R15.1@5005.35,3070.28 5005.35,3192.67 U16.2@5120.31,3307.64 ; U16.2@5175,3307.64 U16.2@5120.31,3307.64 ; C46.1@4625,3325.55 4712.17,3412.72 C30.2@4840,3412.72 C29.2@4920,3412.72 5025.09,3307.64 U16.2@5120.31,3307.64
  Bottom Layer w20: v2(4100,3627.64) 4332.36,3627.64 4608.93,3351.07 v2(4720,3351.07)
pads on no net: H2.5 H2.6 H2.7 H2.8 H2.9 H2.10 Header-232.0 Header-232.1 Header-232.4 Header-232.6 Header-232.7 Header-232.8 Header-232.9 KEY1.1 KEY1.3 KEY2.1 KEY2.3 RESET.1 RESET.3 U2.7 U2.8 U2.9 U2.10 U5.1 U13.2 U19.5
copper on no net:
  other v1: 3739.77,2921.04 3819.77,2921.04 3739.77,3001.04 3819.77,3001.04 3520,3503.82 3600,3503.82 3680,3503.82 3760,3503.82 3520,3583.82 3600,3583.82 3680,3583.82 3760,3583.82 3329.66,3982.9 3405.18,3987.48 3329.66,4062.9 3405.18,4067.48 3329.66,4140 3405.18,4144.57 3329.66,4213.62 3405.18,4218.19 3329.66,4290.72 3405.18,4295.29
  other v3: 1623.11,1620.75 5286.89,1620.75 1623.11,5284.53 5286.89,5284.53

## Polygon pours and split planes (outlines as drawn)
GND on Top Layer "Top Layer-GND 1" (solid, remove dead copper, pour order 66): 1505,5400 1525,5420 5402.64,5420 5402.64,1500 1500,1500
GND on Top Layer "Top Layer-GND 2" (solid, pour order 58): 5354.89,2800 5354.89,2570 4993.36,2570 4980,2556.64 4980,2480 4397.56,2480 4180,2697.56 4180,2800
NetP3_3 on Top Layer "Top Layer-NetP3_3" (solid, pour order 56): 5020,2560 5020,2253.9 5175,2098.9 5175,2061.1 5175,1900 5354.89,1900 5354.89,2560
GND on Top Layer "Top Layer-GND" (solid, pour order 54): 3444.07,3944.57 3934.93,3944.57 3935.02,4460 3444.07,4460
VIN on Top Layer "Top Layer-VIN" (solid, remove dead copper, pour order 52): 3940,4048.33 4124.64,4048.33 4124.64,3709.33 3646.23,3709.33 3220,3709.33 3220,3917.94 3940,3917.94
VIN on Top Layer "Top Layer-VIN 1" (solid, pour order 44): 3940,3140 4140,3140 4140,2490.76 4137.4,2488.17 4105.57,2520 4040,2520 4040,3020 4000,3060 3940,3060
GND on Top Layer "Top Layer-GND" (solid, pour order 42): 3460,3135.14 3460,2735.14 4020,2735.14 4020,2975.14 3840,2975.14 3819.94,2995.2 3820.09,3455.14 3460,3455.14
VIN on Top Layer "Top Layer-VIN 2" (solid, pour order 40): 5153.36,1900 4786.03,1900 4717.2,1968.84 4533.36,1968.84 4533.36,2388.84 3213.36,2388.84 3213.36,3907.95 3291.86,3907.95 3433.36,3907.95 3433.36,2701.52 4160.68,2701.52 4402.2,2460 4993.36,2460 4993.36,2260 5153.36,2100
VOUT12V on Top Layer "Top Layer-VOUT12V" (solid, remove dead copper, pour order 34): 3966.54,3160 4150.28,3160 4200,3110.28 4200,3030.28 4185,3015.28 4185,2805.28 4462.64,2805.28 4500,2842.64 4500,3310.28 4397.56,3412.72 4205,3412.72 4205,3215.28 4195,3205.28 3966.54,3205.28
VOUT5V on Top Layer "Top Layer-VOUT5V" (solid, pour order 35): 3949.66,4057.95 4155.43,4057.95 4185.43,4027.95 4185.43,3947.95 4170.43,3932.95 4170.43,3740 4485.43,3740 4485.43,4227.95 4365.74,4347.64 4190.43,4347.64 4190.43,4132.95 4177.47,4120 3949.66,4120
VOUT_5V on Top Layer "Top Layer-VOUT_5V 1" (solid, pour order 33): 4485.59,3747.73 5354.89,3747.73 5354.89,4380.37 4715.59,4380.37 4485.59,4380.37
VOUT_12V on Top Layer "Top Layer-VOUT_12V" (solid, remove dead copper, pour order 32): 4459.89,3427.51 4459.89,2805.28 5354.89,2805.28 5354.89,3427.51
GND on Top Layer "Top Layer-No Net" (solid, remove dead copper, pour order 22): 4200,3450.28 4805,3450.28 5225.4,3450.28 5354.89,3450.28 5354.89,3685.28 4727.16,3685.28 4215,3685.28 4200,3670.28
GND on Top Layer "Top Layer-No Net" (solid, remove dead copper, pour order 26): 5271.89,4420 5271.4,4420.49 5271.4,4580.19 5271.4,4581.64 5225.4,4627.64 5213.04,4640 4360,4640 4225.43,4640 4190.43,4600 4190.43,4595 4190.43,4400 5263.65,4400
GND on Bottom Layer "Bottom Layer-GND" (solid, remove dead copper, pour order 64): 1500,5400 1502.64,5402.64 5402.64,5402.64 5402.64,1500 5397.64,1505 1505,1505 1505,5395

## Keep-outs
Keep-Out Layer:
  lines w10: 1505,1623.11 ccw(c1623.11,1623.11) 1623.11,1505 5284.53,1505 ccw(c5284.53,1623.11) 5402.64,1623.11 5402.64,5284.53 ccw(c5284.53,5284.53) 5284.53,5402.64 1623.11,5402.64 ccw(c1623.11,5284.53) 1505,5284.53 ; 1505,1623.11 1505,5284.53 ; 1505,1623.11 1505,5284.53 ; 1505,1623.11 1505,5284.53 ; 1505,1623.11 1505,5284.53

## Silkscreen, mask and mechanical layers (free items; w line width, h text height)
Top Overlay:
  lines w0: 3293.68,2903.96 3293.68,3431.32 3360,3497.64 3360,3847.14
  lines w10: 2830,3727.14 2830,3755.44
  lines w15: 1540,1760 1555,1745 2224.34,1745 2230,1750.66 2230,2750.66 2210.76,2769.9 1565.96,2769.9 1540,2743.94 1540,1760
  text "GND" at 3625.89,5382.51 h80 r270
  text "H" at 3200,5340 h140 r180
  text "GND" at 4369.01,5322.87 h60 r270
  text "L" at 3580,5320 h140 r180
  text "B" at 3940,5260 h140 r180
  text "A" at 4360,5260 h140 r180
  text "TX" at 3625.89,5240.59 h80 r270
  text "232" at 2432.27,5192.64 h40
  text "5V" at 4369.65,5182.4 h60 r270
  text "RX" at 3625.89,5146.98 h80 r270
  text "TX" at 4369,5100 h60 r270
  text "5V" at 3625.89,5040.59 h80 r270
  text "485" at 4020,4995.58 h100
  text "CAN" at 3263.22,4980 h100 r359
  text "DBUS" at 4400.96,4939.61 h100
  text "UART3" at 3405.18,4854.13 h80 r359
  text "GND" at 5372.67,4692.96 h60 r90
  text "485" at 3420,4540 h80 r359
  text "+5V" at 5367.67,3882.96 h60 r90
  text "3V3" at 1744.77,3820 h50
  text "DIO" at 1744.78,3709.57 h50 r359
  text "GND" at 5362.24,3697.64 h60 r90
  text "CLK" at 1745.22,3609.57 h50 r1
  text "GND" at 1744.77,3504.57 h50
  text "+12V" at 5362.24,2987.64 h60 r90
  text "GND" at 4940,2634.33 h80 r90
  text "+24V" at 4940,2320 h80 r90
  text "MPU9250" at 2040,1960 h100 r180
  text "OFF     ON" at 4900,1760 h100
  text "OUT1 OUT2 OUT3 OUT4 GND" at 3774.1,1725.9 h80
  text "IN1 IN2 IN3 IN4 GND" at 2980,1720 h80
  text "IN" at 2992.02,1560 h100
  text "OUT" at 4487.37,1560 h100
Bottom Overlay:
  drawing of 5782 lines, arcs and shapes, not listed
  text "Mick Robot Controller V1.1.1" at 4740,3720 h100

## Text inside footprints (layer, text, board x,y; h text height)
Header-232: Top Overlay "5" at 2765.28,4720.77 h35; Top Overlay "1" at 2194.41,4720.77 h35; Top Overlay "9" at 2703.82,4819.26 h35 r5; Top Overlay "6" at 2258.94,4819.26 h35 r5
P1: Top Overlay "2" at 3615.89,4495.02 h50 r90; Top Overlay "1" at 3715.89,4515.02 h50 r90